# Altium PCB PCB.PcbDoc
Units mm, origin at the board's own origin, x right, y up, seen from the top; angles counter-clockwise.
Board outline 73.41 x 41.02 mm, 4 copper layers (Top Layer, Internal Plane 1, Internal Plane 2, Bottom Layer); 24 components, 20 nets, 81 pads, 0 vias.
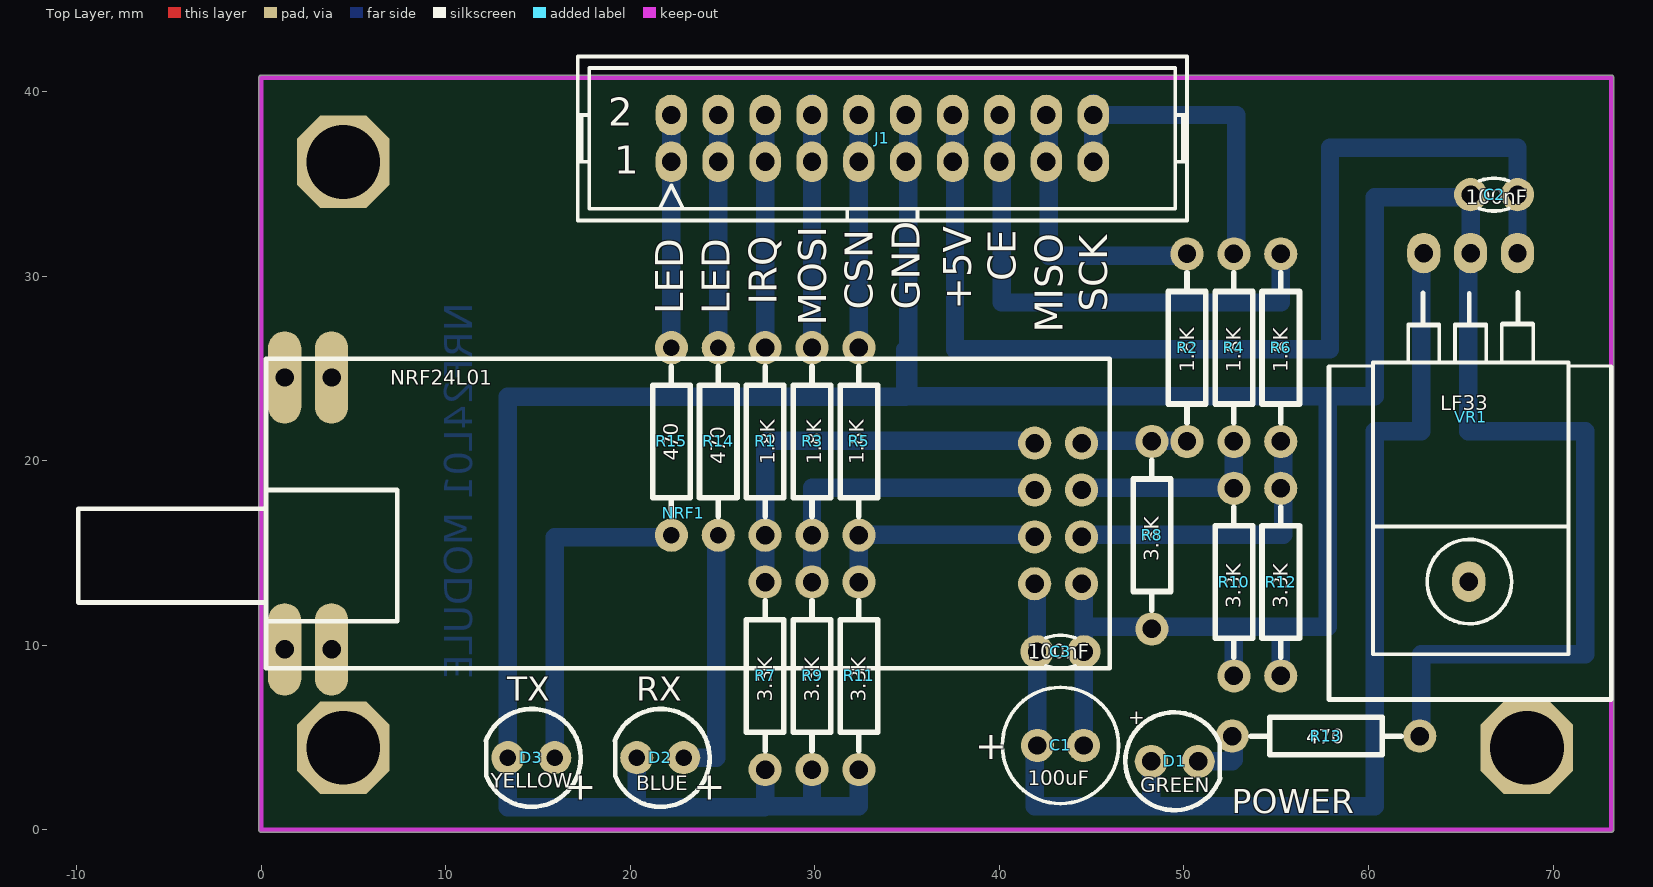
[diagram p0: Top Layer view]
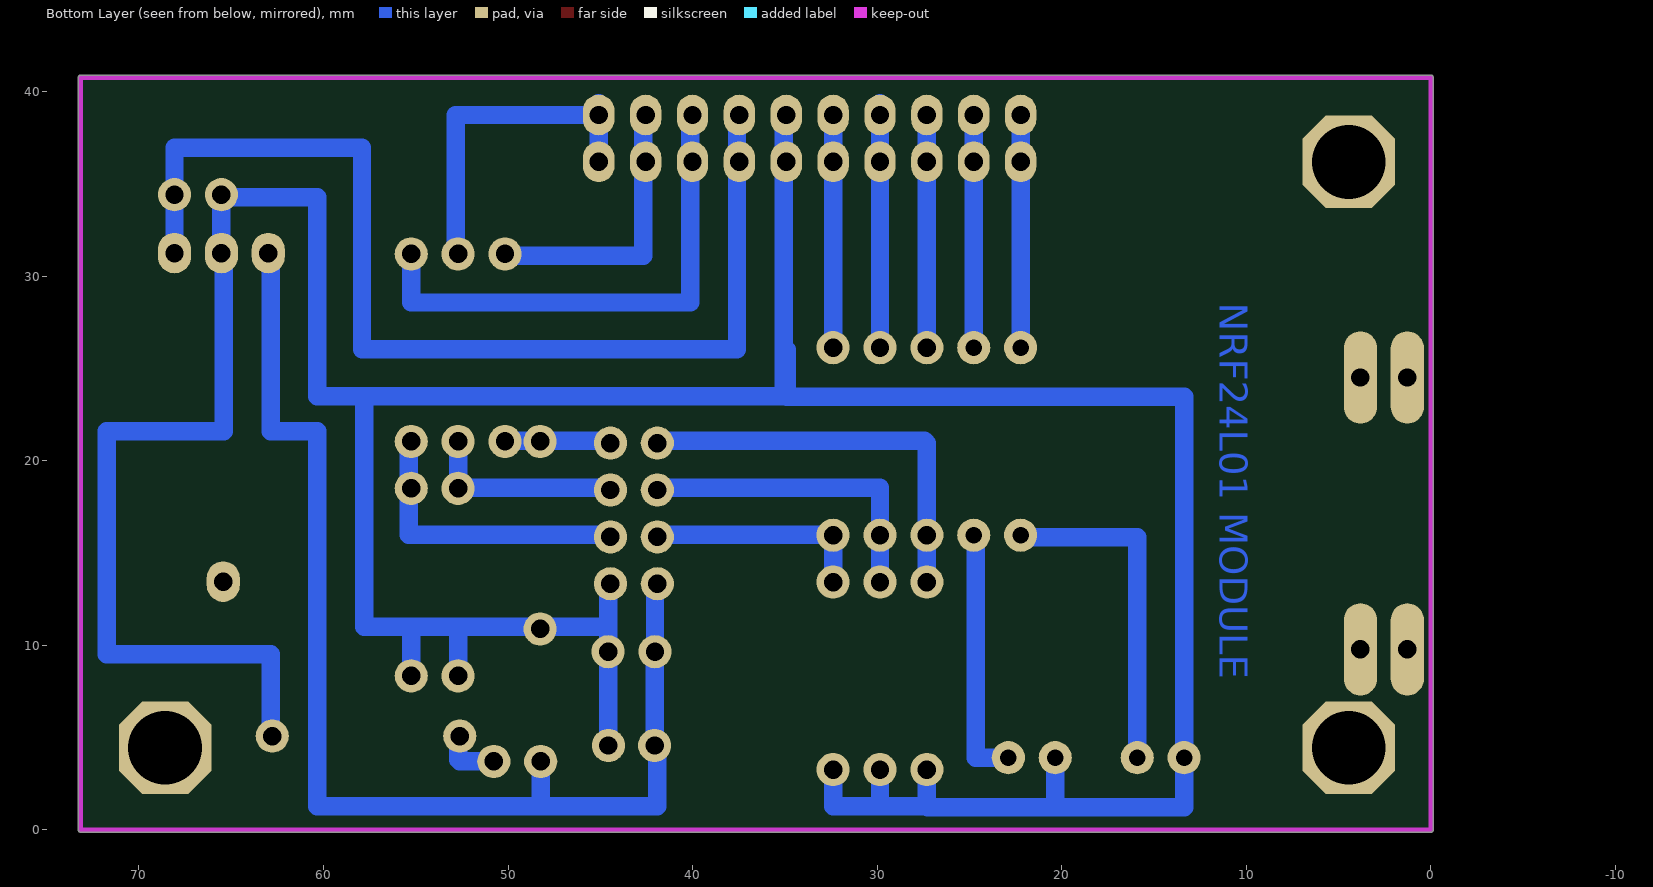
[diagram p1: Bottom Layer view, seen from below]
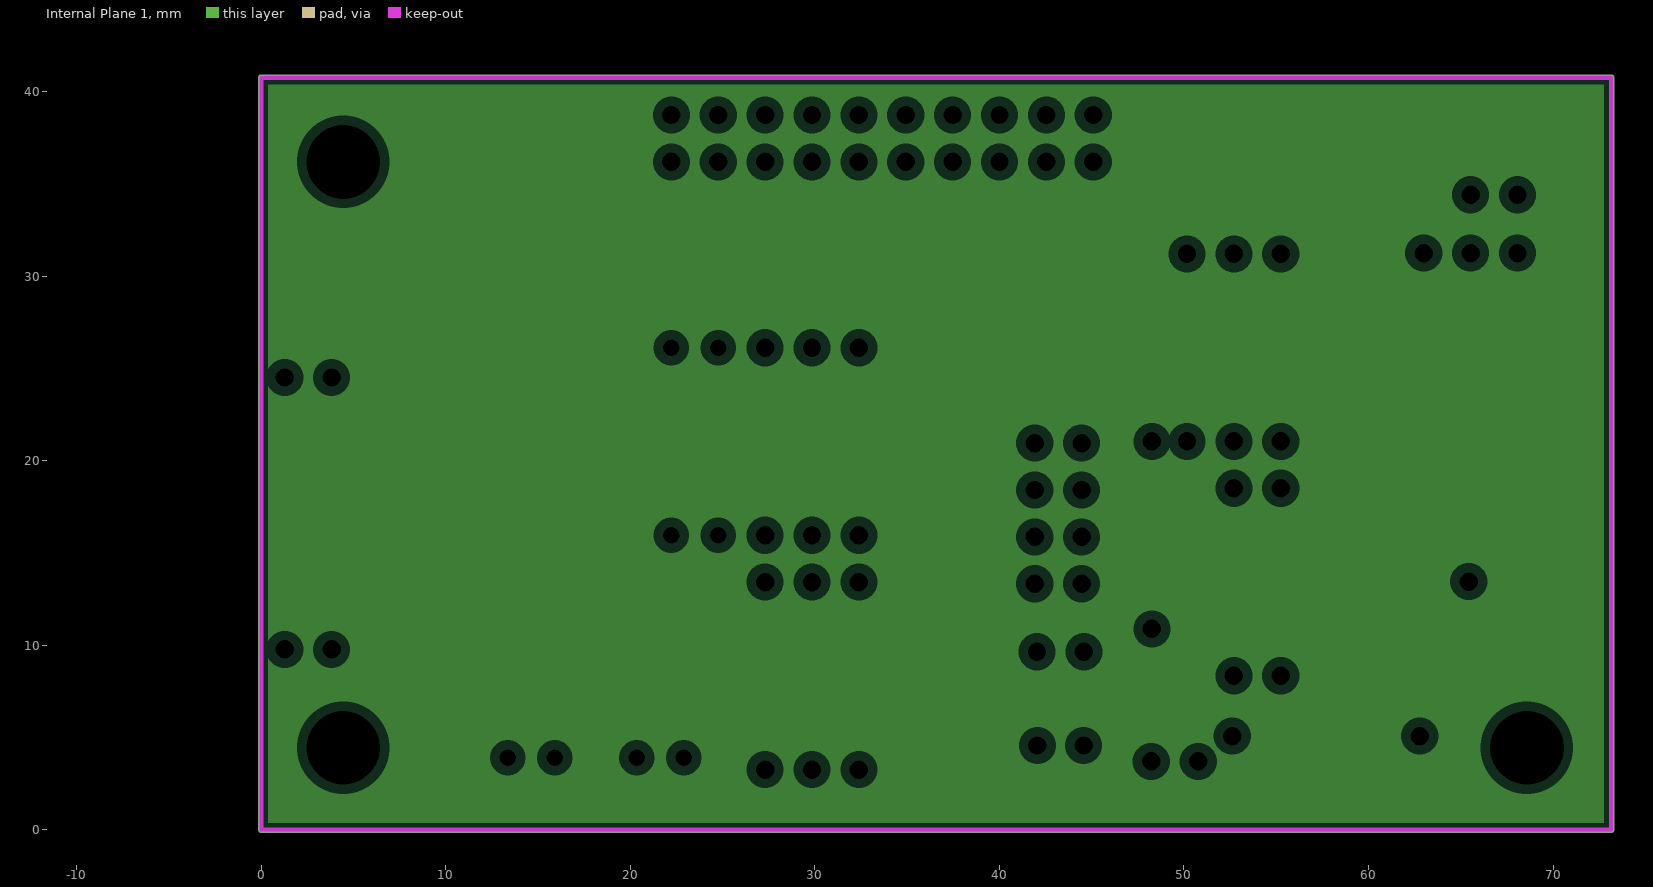
[diagram p2: Internal Plane 1, clearances drawn from the general rule]
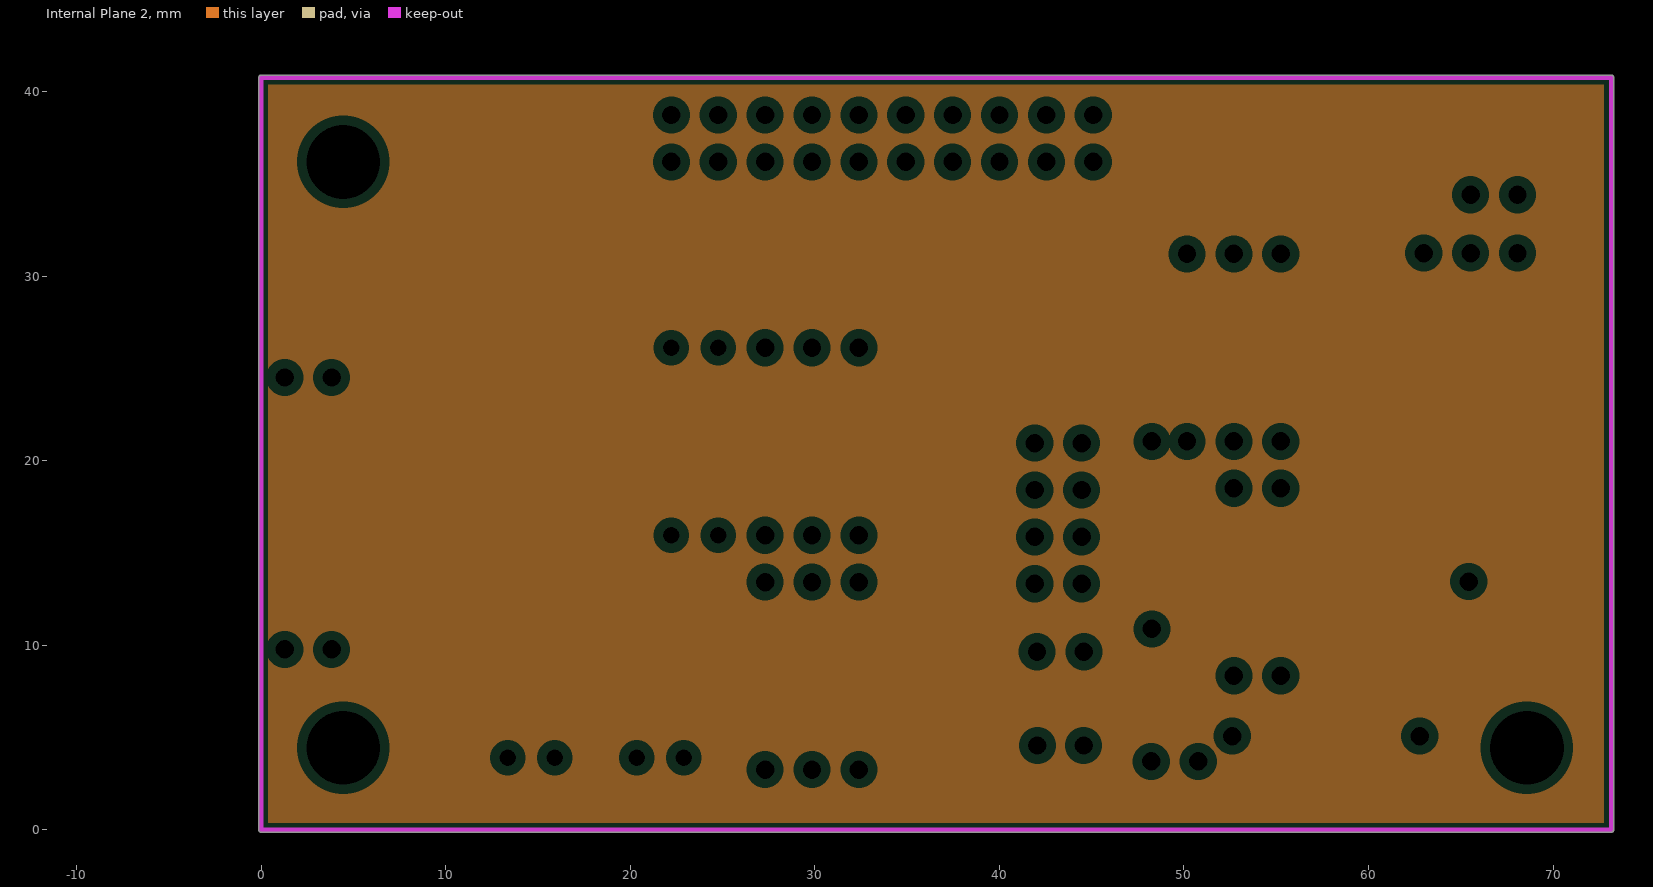
[diagram p3: Internal Plane 2, clearances drawn from the general rule]
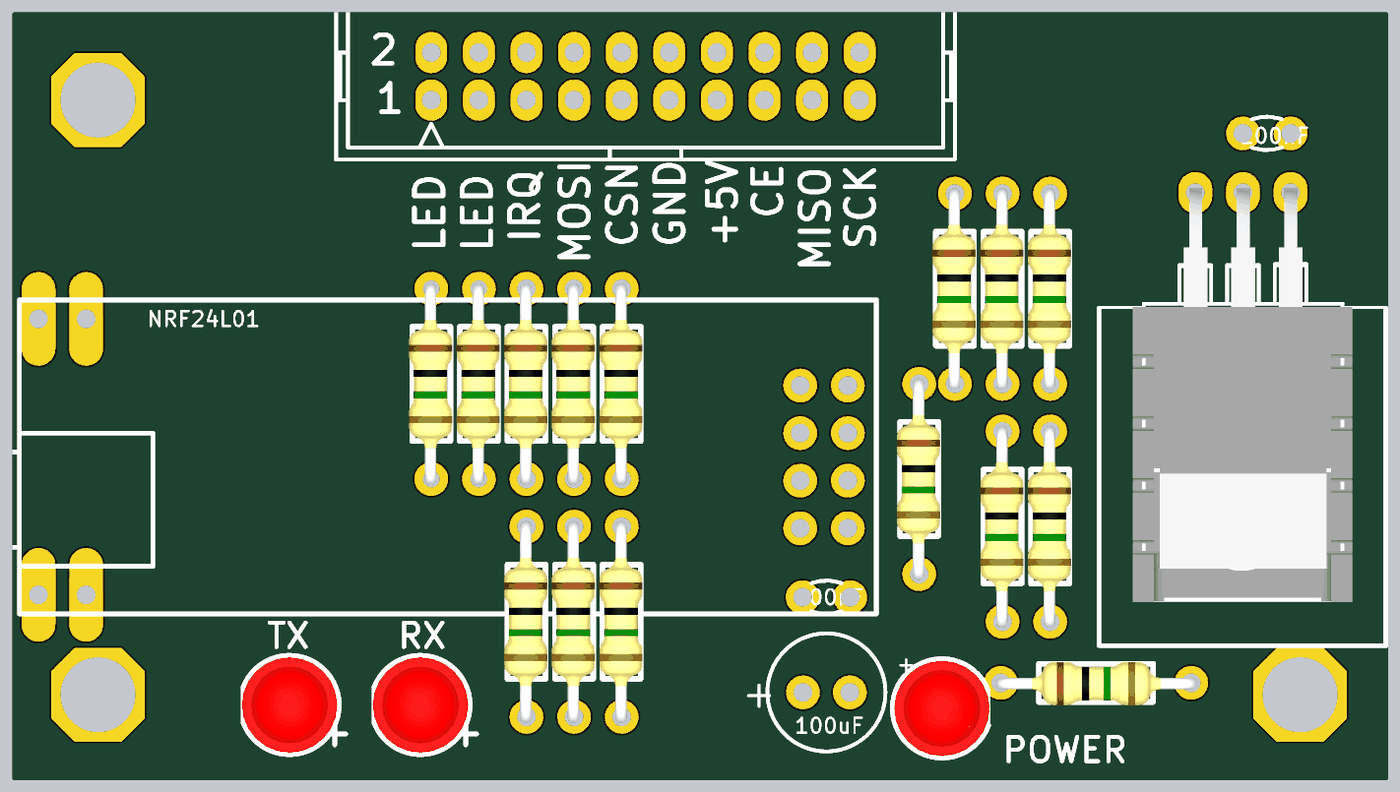
[diagram p4: 3D render of the assembled board from above, using the file's embedded part models]

## Layer stack, top to bottom
Top Solder: solder mask 0.0102, Solder Resist, Dk 3.5
Top Layer: signal copper 0.0356
Dielectric1: dielectric 0.32, FR-4, Dk 4.8
Internal Plane 1: plane copper 0.0356
Dielectric2: dielectric 0.32, FR-4, Dk 4.8
Internal Plane 2: plane copper 0.0356
Dielectric3: dielectric 0.32, FR-4, Dk 4.8
Bottom Layer: signal copper 0.0356
Bottom Solder: solder mask 0.0102, Solder Resist, Dk 3.5

## Board outline
0,-0.127 cw(c0,0) -0.127,0 -0.127,40.767 cw(c0,40.767) 0,40.894 73.152,40.894 cw(c73.152,40.767) 73.279,40.767 73.279,0 cw(c73.152,0) 73.152,-0.127

## Design rules (kind name [scope] priority, off if disabled: settings)
Clearance [All] p1: gap=0.6
ComponentClearance [All] p1: gap=0 collisioncheckmode=3 verticalgap=0 showdistances=FALSE
Height [All] p1: minheight=0 maxheight=50 prefheight=12.7
HoleSize [All] p1: absolutevalues=TRUE maxlimit=5 minlimit=0.025 maxpercent=80.000 minpercent=20.000
PlaneClearance [All] p1: clearance=0.508
PlaneConnect [All] p1: planeconnectstyle=Relief reliefexpansion=0.508 reliefentries=2 reliefconductorwidth=0.254 reliefairgap=0.254
PolygonConnect [All] p1: connectstyle=Direct reliefconductorwidth=0.254 reliefentries=4 polygonreliefangle="90 Angle" airgapwidth=0.254
RoomDefinition Main [InComponentClass('Main')] p1: confinementstyle=ConfineIn formatcopy=TRUE lockcomponents=FALSE outline -44.323,-120.523 6.477,-120.523 6.477,-95.123 -44.323,-95.123
RoutingVias [All] p1: holewidth=0.813 width=1.575 viastyle="Through Hole" minholewidth=0.711 minwidth=1.27 maxholewidth=0.711 maxwidth=1.27
SilkToSolderMaskClearance SilkscreenOverComponentPads [IsPad] p1: minsilkscreentomaskgap=0.254 clearancetoexposedcopper=TRUE
SolderMaskExpansion [All] p1: expansion=0.102
Width [All] p1: maxlimit=0.5 minlimit=0.254 preferedwidth=0.3
24 further rules are at their usual default settings.

## Components (designator, comment, footprint, x,y, rotation, side; value= is the part's Value field where it differs from the comment)
C1 "100uF" CAPPR2.5-6.3x5 43.307,4.572 r0 top
C2 "100nF" CAPNTO2.54-3.05x1.78A 66.802,34.417 r0 top
C3 "100nF" CAPNTO2.54-3.05x1.78A 43.307,9.652 r180 top
D1 "GREEN" LED-5mm_Red#1 49.53,3.81 r0 top
D2 "BLUE" LED-5mm_Red#2 21.59,3.81 r180 top
D3 "YELLOW" LED-5mm_Red#2 14.605,3.81 r180 top
J1 "Header 10X2" FKV20SN 33.655,37.465 r0 top
NRF1 "NRF24L01" NRF24L01+PA+LNA 41.91,13.335 r0 top
R1 "1.8K" AXIAL-0.4#1 27.305,22.225 r270 top
R2 "1.8K" AXIAL-0.4#1 50.165,27.305 r270 top
R3 "1.8K" AXIAL-0.4#1 29.845,22.225 r270 top
R4 "1.8K" AXIAL-0.4#1 52.705,27.305 r270 top
R5 "1.8K" AXIAL-0.4#1 32.385,22.225 r270 top
R6 "1.8K" AXIAL-0.4#1 55.245,27.305 r270 top
R7 "3.3K" AXIAL-0.4#1 27.305,9.525 r270 top
R8 "3.3K" AXIAL-0.4#1 48.26,17.145 r270 top
R9 "3.3K" AXIAL-0.4#1 29.845,9.525 r270 top
R10 "3.3K" AXIAL-0.4#1 52.705,14.605 r270 top
R11 "3.3K" AXIAL-0.4#1 32.385,9.525 r270 top
R12 "3.3K" AXIAL-0.4#1 55.245,14.605 r270 top
R13 "470" AXIAL-0.4#1 56.515,5.08 r0 top
R14 "470" AXIAL-0.4#2 24.765,22.225 r270 top
R15 "470" AXIAL-0.4#2 22.225,22.225 r270 top
VR1 "LF33" TO257H_2 65.532,22.352 r180 top

## Footprints (in the part's own frame and the unit in brackets; to place one, negate y for a bottom-side part, rotate by r counter-clockwise, add the part's x,y. Pads: shape width x height; smd on the part's side, far side on the other; paste and mask are expansions set on the pad)
AXIAL-0.4#1 [mm]
  round 1.8 hole 1: 1(-3.9,0) 2(6.26,0)
  silkscreen extent -2.88,-1.02 5.24,1.02, body extent -4.19,-1.19 6.58,1.12, height 3.51
AXIAL-0.4#2 [mm]
  round 1.8 hole 0.9: 1(-3.9,0) 2(6.26,0)
  silkscreen extent -2.88,-1.02 5.24,1.02, body extent -4.19,-1.19 6.58,1.12, height 3.51
CAPNTO2.54-3.05x1.78A [mm] "Capacitor, Radial, Tantalum, Non-Polarised; Body 3.05 x 1.78 x 3.43 mm (WxTxH max); Pin Spacing 2.54 mm (typ)"
  round 1.8 hole 1: 1(-1.27,0) 2(1.27,0)
  silkscreen extent -0.8,-0.89 0.8,0.89
CAPPR2.5-6.3x5 [mm] "Capacitor, Electrolytic, Radial; Body 6.3 x 5 mm (Dia.xH typ); Pin Spacing 2.5 mm (typ)"
  round 1.8 hole 1: 1(-1.25,0) 2(1.25,0)
  silkscreen extent -3.15,-3.15 3.15,3.15
FKV20SN [mm]
  oval 1.7x2.2 hole 1: 1(-11.43,-1.27) 2(-11.43,1.27) 3(-8.89,-1.27) 4(-8.89,1.27) 5(-6.35,-1.27) 6(-6.35,1.27) 7(-3.81,-1.27) 8(-3.81,1.27) 9(-1.27,-1.27) 10(-1.27,1.27) 11(1.27,-1.27) 12(1.27,1.27) 13(3.81,-1.27) 14(3.81,1.27) 15(6.35,-1.27) 16(6.35,1.27) 17(8.89,-1.27) 18(8.89,1.27) 19(11.43,-1.27) 20(11.43,1.27)
  silkscreen extent -16.51,-4.44 16.51,4.44
LED-5mm_Red#1 [mm]
  round 1.8 hole 1: 1(-1.3,-0.1) 2(1.24,-0.1)
  silkscreen extent -2.71,-2.74 2.43,2.56, body extent -2.6,-2.64 2.48,2.46, height 9.6
LED-5mm_Red#2 [mm]
  round 1.8 hole 0.9: 1(-1.3,-0.1) 2(1.24,-0.1)
  silkscreen extent -2.71,-2.74 2.43,2.56, body extent -2.6,-2.64 2.48,2.46, height 9.6
NRF24L01+PA+LNA [mm]
  oval 1.8x5 hole 1: 0(-40.64,-3.556) 1(-38.1,-3.556) 2(-38.1,11.176) 3(-40.64,11.176)
  round 1.8 hole 1: CE(2.54,2.54) CSN(0,2.54) GND(2.54,0) IRQ(0,7.62) MISO(2.54,7.62) MOSI(0,5.08) SCK(2.54,5.08) VCC(0,0)
  silkscreen extent -51.82,-4.57 4.06,12.19
TO257H_2 [mm]
  oval 1.8x2.2 hole 1: 0(0.1,8.901) 1(-2.54,-8.901) 2(0,-8.901) 3(2.54,-8.901)
  silkscreen extent -7.62,-6.78 7.7,15.29, body extent -5.84,-9.14 5.87,12.95, height 8.89

## Part data
C1: library part "Cap Pol1", "Polarized Capacitor (Radial)"
C2 C3: library part Cap, "Capacitor"
D1 D2 D3: library part LED, "Typical INFRARED GaAs LED"
J1: "Header, 10-Pin, Dual row"
R1 R2 R3 R4 R5 R6 R7 R8 R9 R10 R11 R12 R13 R14 R15: library part Res1, "Resistor"
VR1: library part "Volt Reg", "Voltage Regulator"

## Free pads (board coordinates)
  oct 5x5 hole 4: 0(4.445,4.445) 0(4.445,36.195) 0(68.58,4.445)

## Nets (pads, with @x,y where several pads share a name; then routed paths per layer and width w, separated by ;. In a path a pad name is that pad's centre, name@x,y a point inside that pad or via, vN(x,y) a via of type N, cw(c..) or ccw(c..) an arc to the next point about the centre after c; other vN are vias at no path point)
3.3V: C1.1 C3.2 D1.1 NRF1.VCC VR1.3 | length 65.8
  Bottom Layer w1: C1.1@41.91,4.445 41.91,1.27 60.325,1.27 60.325,21.59 62.865,21.59 62.865,31.38 VR1.3 ; C3.2 NRF1.VCC@42.037,13.462 ; C1.1 C3.2@42.057,9.632 ; 48.23,1.27 D1.1@48.23,3.81
5V: C2.2 J1.13 J1.14 VR1.1 | length 59.9
  Bottom Layer w1: J1.14@37.592,38.862 37.592,26.035 57.912,26.035 57.912,36.957 68.072,36.957 C2.2 VR1.1 VR1.1@68.072,31.242
CE_3.3V: NRF1.CE R6.2 R12.1 | length 16
  Bottom Layer w1: NRF1.CE@44.577,16.002 55.372,16.002 R6.2@55.372,21.172
CE_5V: J1.15 J1.16 R6.1 | length 27.9
  Bottom Layer w1: J1.16@40.132,38.862 40.132,28.575 55.245,28.575 R6.1@55.245,31.115
CSN_3.3V: NRF1.CSN R5.2 R11.1 | length 12
  Bottom Layer w1: R11.1 R5.2@32.385,15.875 ; R5.2@32.512,16.002 NRF1.CSN@42.037,16.002
CSN_5V: J1.9 J1.10 R5.1 | length 12.6
  Bottom Layer w1: R5.1 J1.9 J1.10
GND: C1.2 C2.1 C3.1 D2.2 D3.2 J1.11 J1.12 NRF1.GND R7.2 R8.2 R9.2 R10.2 R11.2 R12.2 R13.2 VR1.2 | length 214.3
  Bottom Layer w1: 20.35,1.3 D2.2 ; 27.305,1.285 27.247,1.227 13.365,1.227 13.365,23.465 34.895,23.465 34.895,26.005 ; R7.2 27.305,1.27 29.845,1.27 ; R9.2 29.845,1.27 ; R11.2@32.385,3.175 32.385,1.27 29.845,1.27 ; J1.12@35.052,38.862 35.052,23.495 57.785,23.495 ; C1.2 C3.1@44.557,9.632 ; C3.1 NRF1.GND@44.577,13.462 ; 44.667,11.012 57.785,11.012 57.785,23.495 ; R10.2 52.705,10.795 ; R12.2 55.245,10.795 ; R13.2@62.865,5.08 62.865,9.525 71.755,9.525 71.755,21.59 65.405,21.59 VR1.2@65.405,31.75 ; C2.1@65.405,34.29 60.325,34.29 60.325,23.495 57.785,23.495 ; VR1.2@65.532,31.75 C2.1
IRQ_3.3V: NRF1.IRQ R1.2 R7.1 | length 22.3
  Bottom Layer w1: R7.1 R1.2 27.305,20.955 27.432,21.082 NRF1.IRQ@42.037,21.082
IRQ_5V: J1.5 J1.6 R1.1 | length 12.6
  Bottom Layer w1: R1.1 J1.5 J1.6
LED_RX: J1.3 J1.4 R14.1 | length 12.6
  Bottom Layer w1: R14.1 J1.3 J1.4
LED_TX: J1.1 J1.2 R15.1 | length 12.6
  Bottom Layer w1: R15.1 J1.1 J1.2
MISO_3.3V: NRF1.MISO R2.2 R8.1 | length 5.8
  Bottom Layer w1: NRF1.MISO@44.577,21.082 50.292,21.082 R2.2@50.292,21.172
MISO_5V: J1.17 J1.18 R2.1 | length 15.2
  Bottom Layer w1: J1.18@42.672,38.862 42.672,31.115 R2.1@50.165,31.115
MOSI_3.3V: NRF1.MOSI R3.2 R9.1 | length 17.3
  Bottom Layer w1: R9.1 R3.2 29.845,18.542 NRF1.MOSI@42.037,18.542
MOSI_5V: J1.7 J1.8 R3.1 | length 13.2
  Bottom Layer w1: R3.1 J1.7 J1.8 J1.8@29.845,39.37
NetD1_2: D1.2 R13.1 | length 3.2
  Bottom Layer w1: D1.2 52.605,3.71 52.705,3.81 R13.1@52.705,5.08
NetD2_1: D2.1 R14.2 | length 13.8
  Bottom Layer w1: D2.1 24.665,3.91 24.665,15.775 R14.2@24.765,15.875
NetD3_1: D3.1 R15.2 | length 18.3
  Bottom Layer w1: D3.1 15.905,15.845 22.195,15.845 R15.2@22.225,15.875
SCK_3.3V: NRF1.SCK R4.2 R10.1 | length 10.8
  Bottom Layer w1: NRF1.SCK@44.577,18.542 52.705,18.542 R4.2 R4.2@52.832,21.172
SCK_5V: J1.19 J1.20 R4.1 | length 18.5
  Bottom Layer w1: J1.19 J1.20 J1.20@45.085,39.37 ; J1.20@45.212,38.862 45.212,38.735 52.832,38.735 R4.1@52.832,31.115
pads on no net: NRF1.0 NRF1.1 NRF1.2 NRF1.3 VR1.0

## Polygon pours and split planes (outlines as drawn)
no net on Internal Plane 1 (split plane): 72.769,0.383 0.383,0.383 0.383,40.384 72.769,40.384
no net on Internal Plane 2 (split plane): 72.769,0.383 0.383,0.383 0.383,40.384 72.769,40.384

## Keep-outs
Keep-Out Layer:
  lines w0.254: 0,0 73.152,0 73.152,40.767 0,40.767 0,0

## Other copper
Bottom Layer:
  text "NRF24L01 MODULE" at 11.43,28.575 h1.52 r90

## Silkscreen, mask and mechanical layers (free items; w line width, h text height)
Top Overlay:
  text "CE" at 40.894,29.718 h1.52 r90
  text "IRQ" at 27.94,28.448 h1.52 r90
  text "CSN" at 33.147,28.194 h1.52 r90
  text "GND" at 35.687,28.194 h1.52 r90
  text "+5V" at 38.481,28.194 h1.52 r90
  text "SCK" at 45.847,28.067 h1.52 r90
  text "LED" at 22.86,27.94 h1.52 r90
  text "LED" at 25.4,27.94 h1.52 r90
  text "MOSI" at 30.607,27.305 h1.52 r90
  text "MISO" at 43.434,26.924 h1.52 r90
  text "TX" at 13.335,6.985 h1.3
  text "RX" at 20.32,6.985 h1.3
  text "POWER" at 52.578,0.889 h1.3

## Text inside footprints (layer, text, board x,y; h text height)
C1: Top Overlay "+" at 38.682,3.822 h1.5
D1: Top Overlay "+" at 46.99,5.715 h0.8
D2: Top Overlay "+" at 25.176,2.945 h1.52 r180
D3: Top Overlay "+" at 18.191,2.945 h1.52 r180
J1: Top Overlay "1" at 19.126,35.56 h1.52; Top Overlay "2" at 18.796,38.151 h1.52